# Altium PCB MicroMod_ATP_CarrierBoard.PcbDoc (part 1 of 2)
Units mil, origin at the board's own origin, x right, y up, seen from the top; angles counter-clockwise.
Board outline 3400 x 2200 mil, 2 copper layers (Top, Bottom); 222 components, 72 nets, 322 pads, 144 vias.
Unrouted connection lines stored in the file: 6.
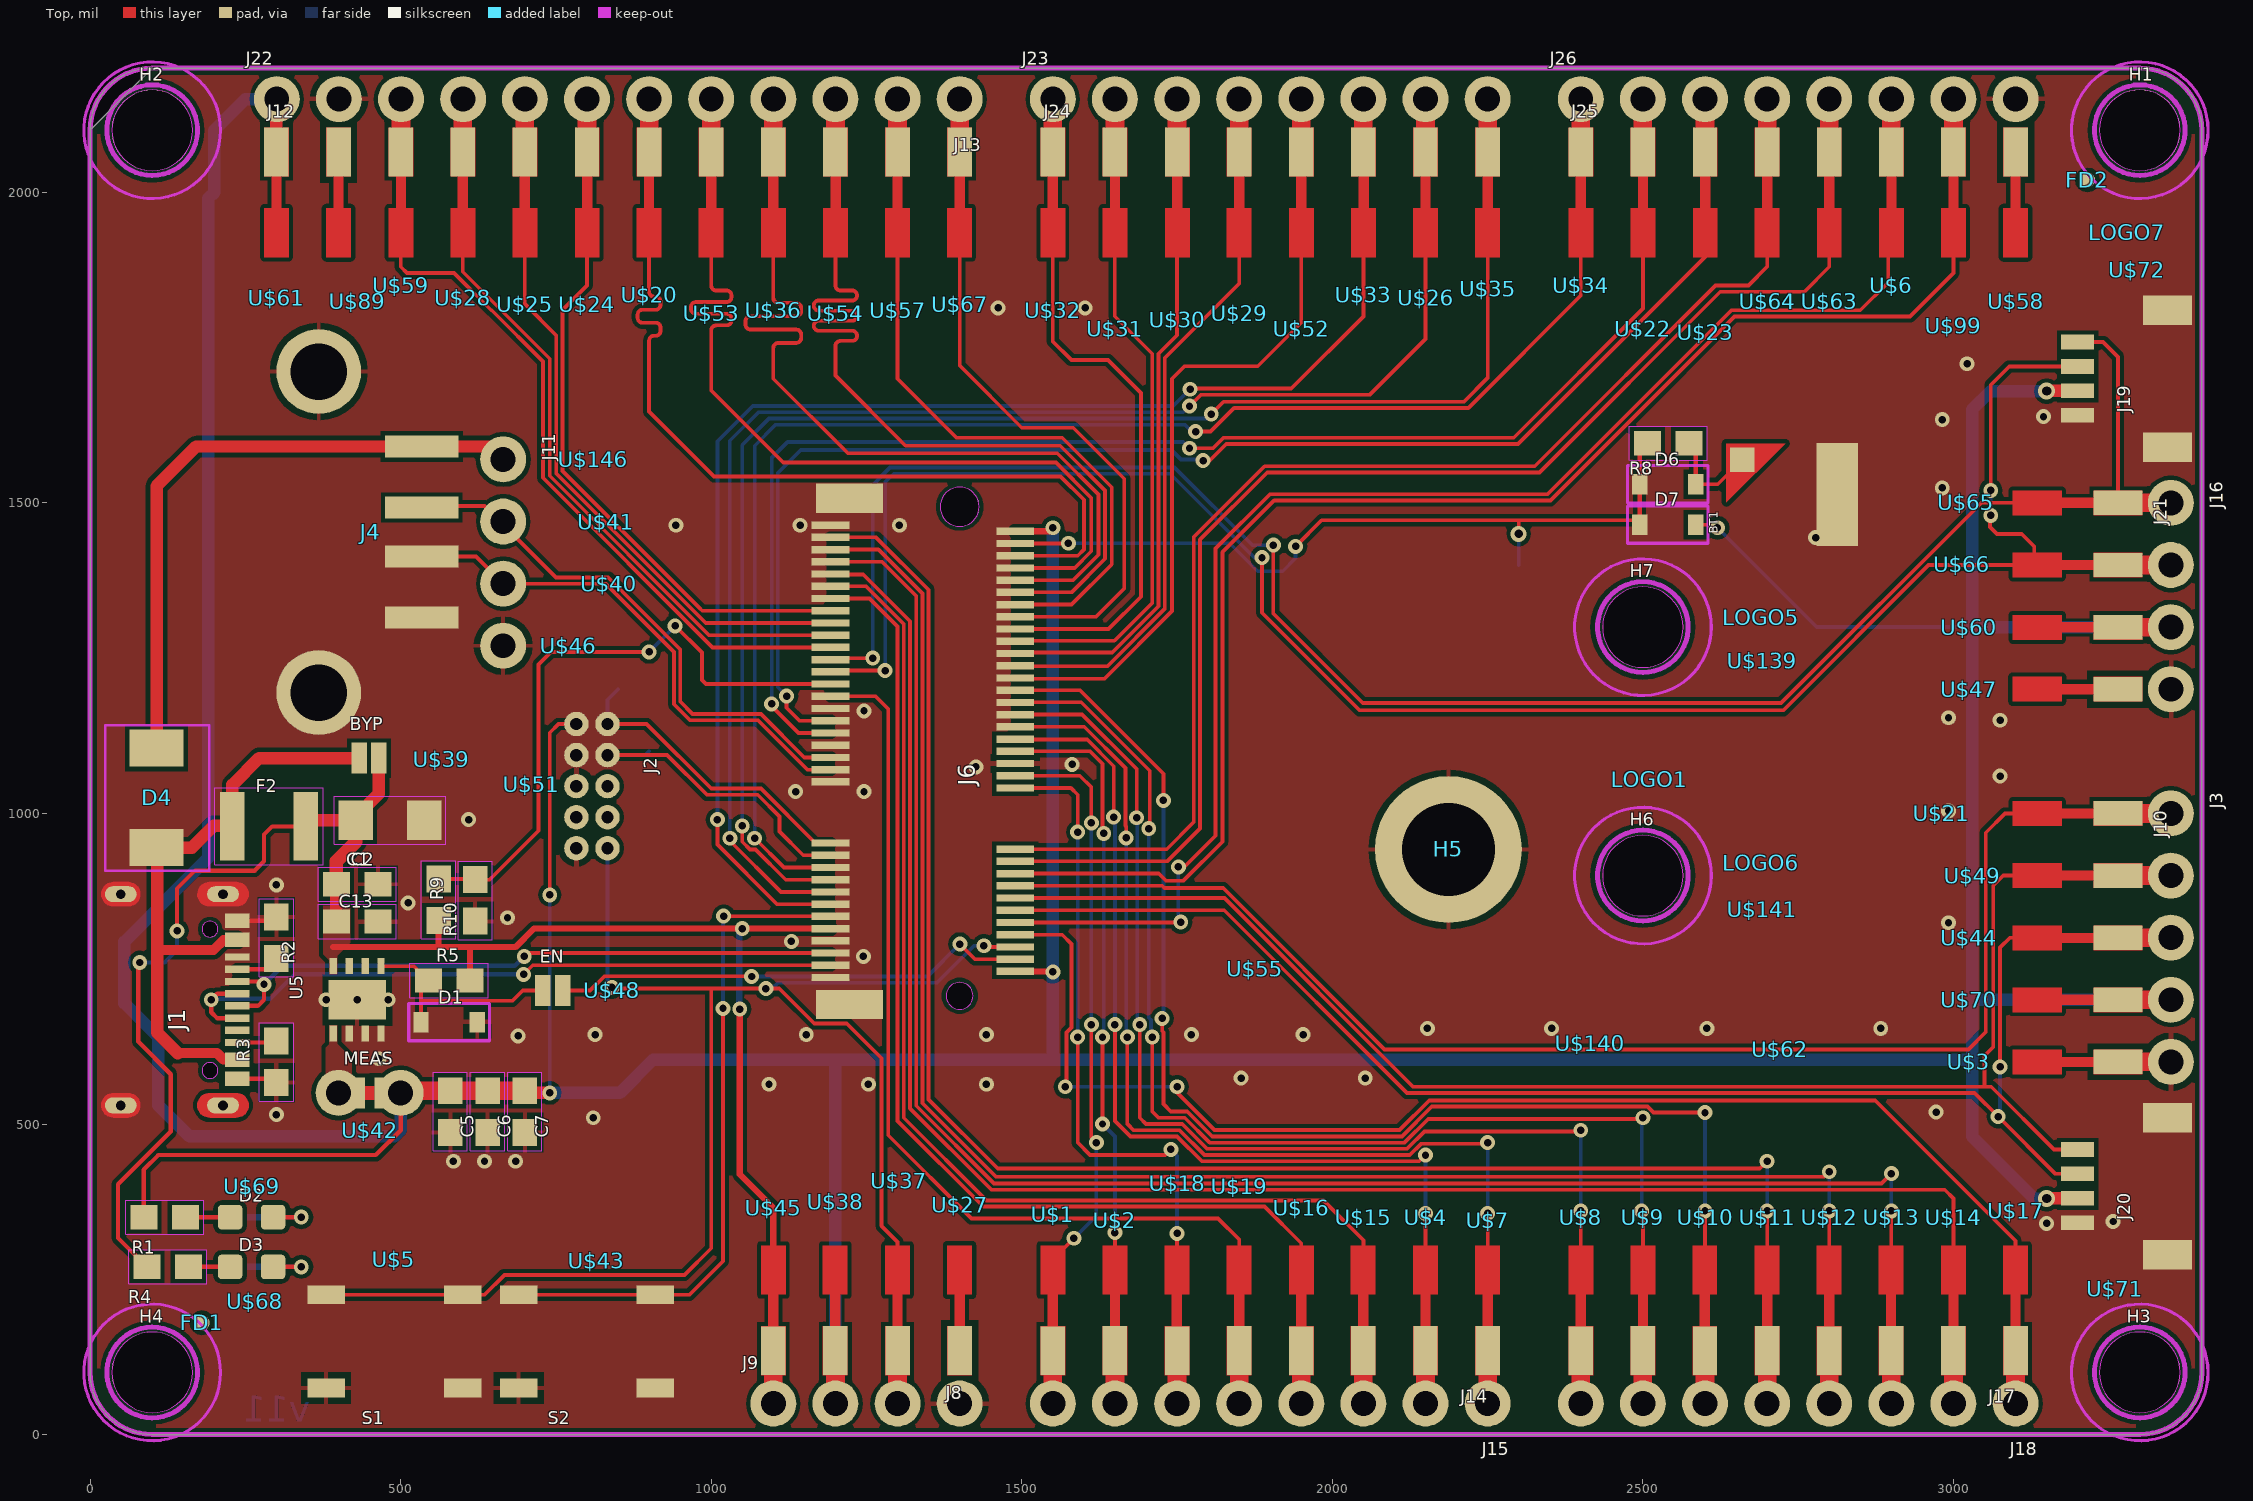
[diagram p0: Top view]
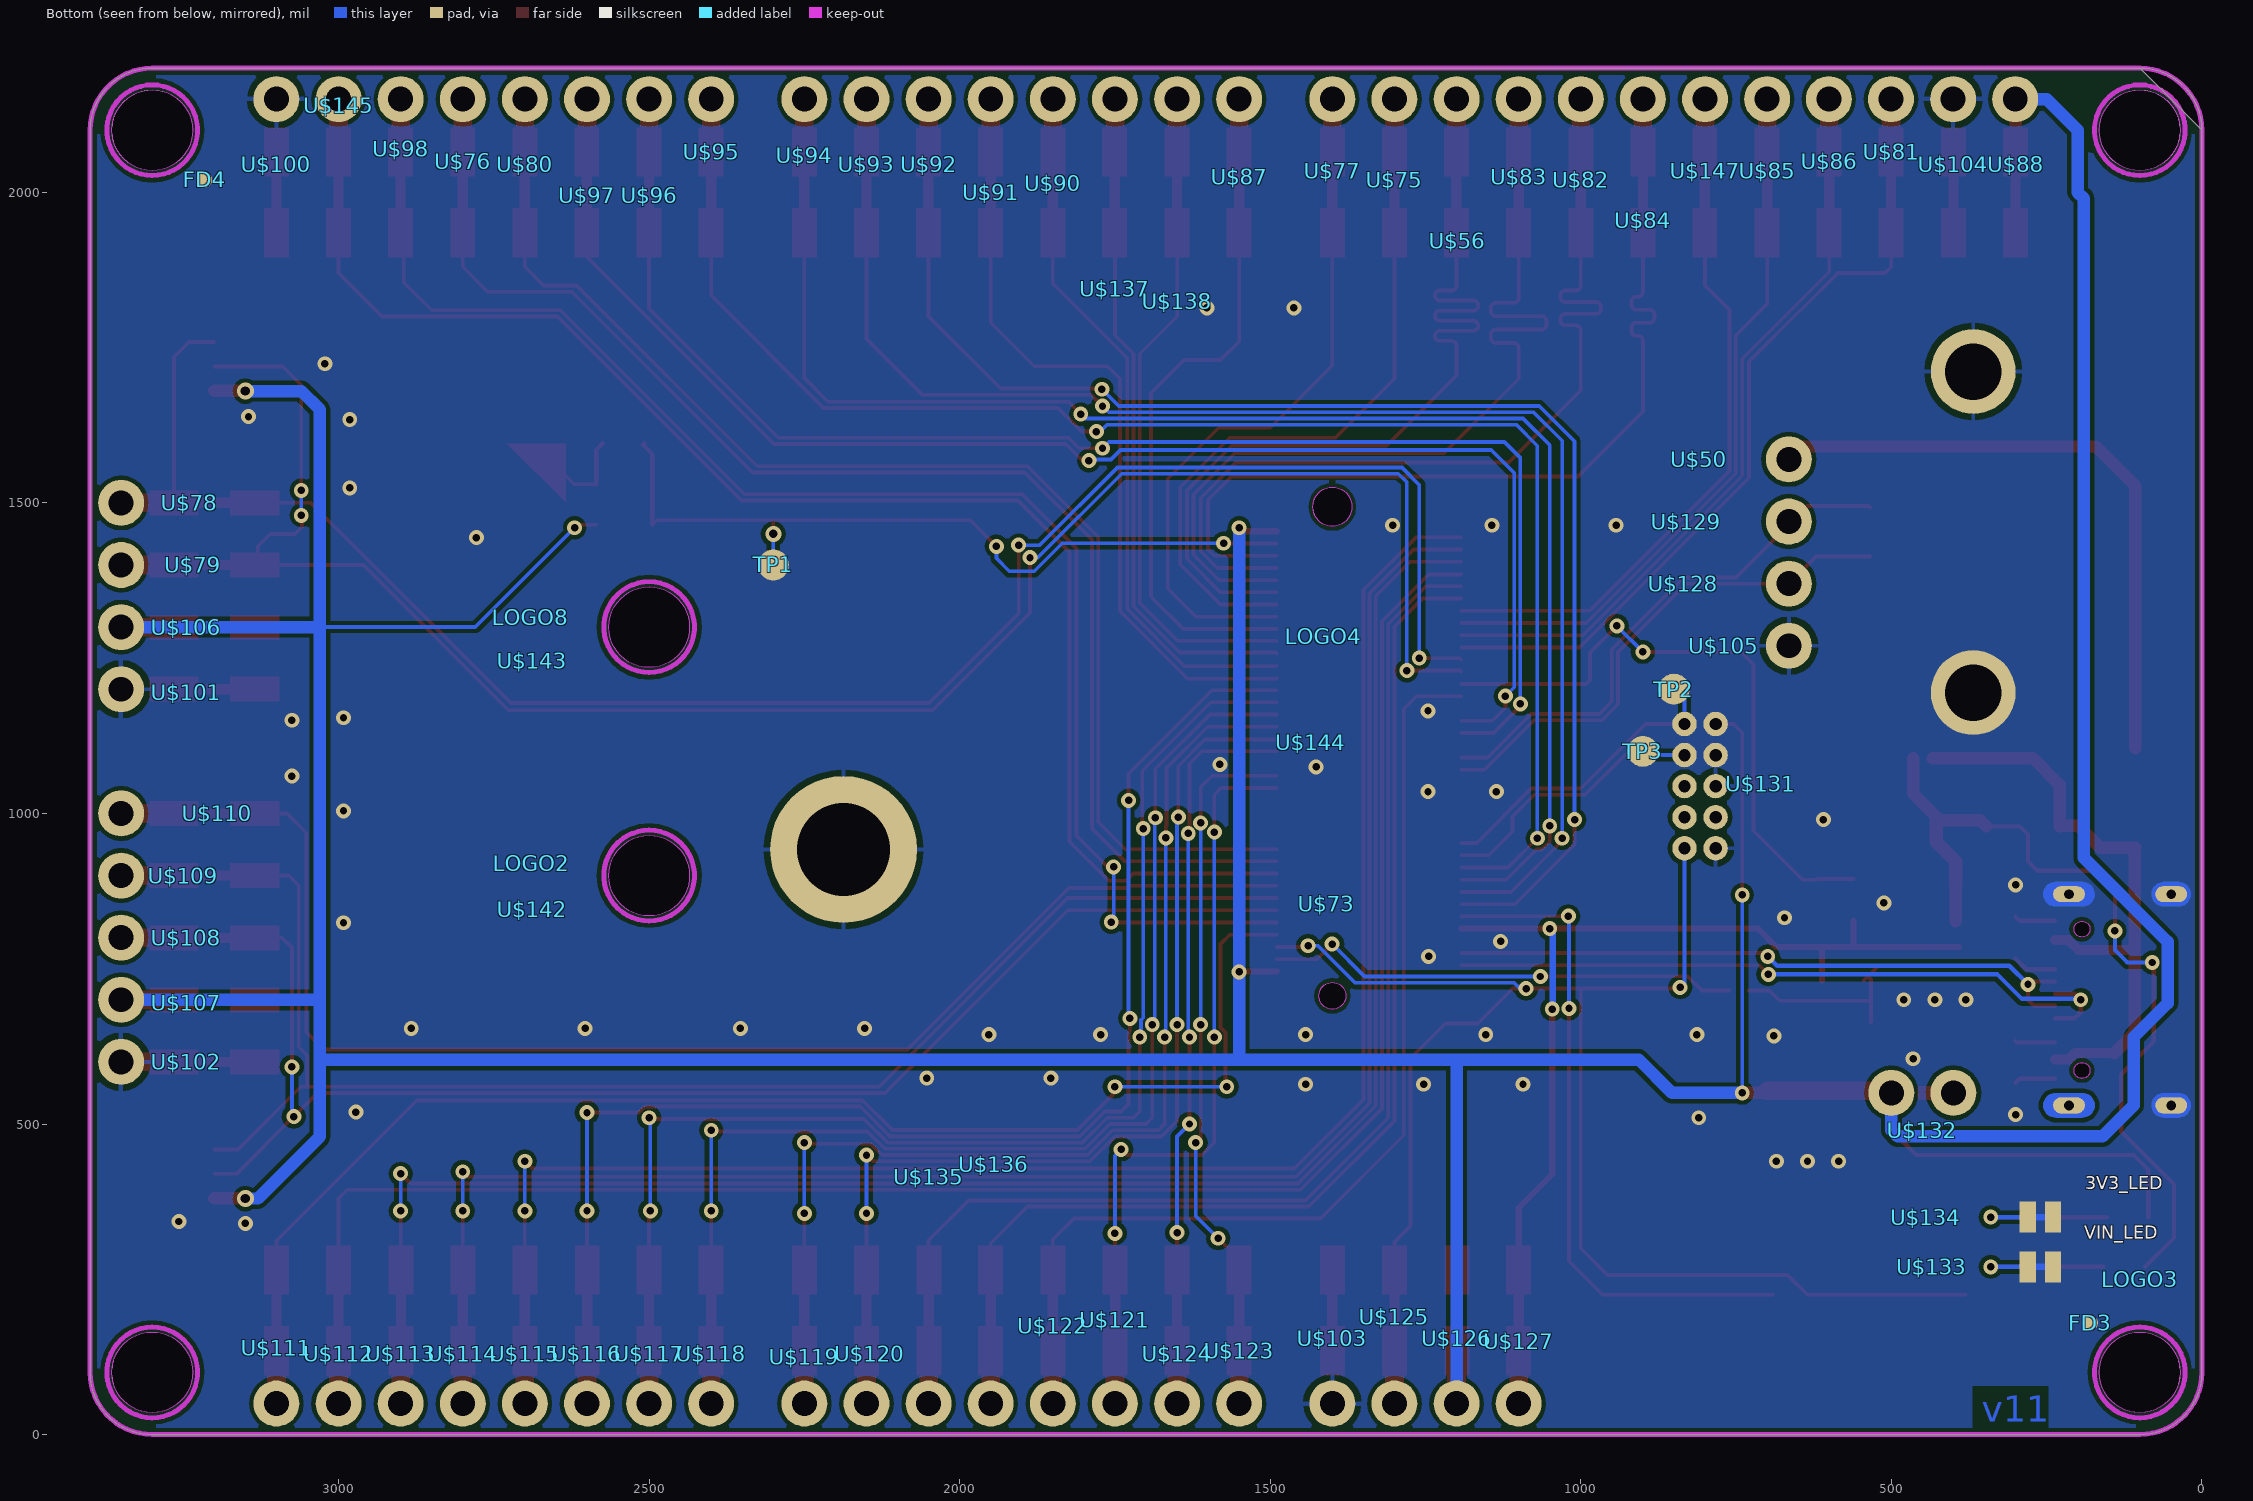
[diagram p1: Bottom view, seen from below]

## Layer stack, top to bottom
Top Solder: solder mask 0.4, Solder Resist, Dk 3.5
Top: signal copper 1.378
Dielectric 1: dielectric 12.6, FR-4, Dk 4.8
Bottom: signal copper 1.378
Bottom Solder: solder mask 0.4, Solder Resist, Dk 3.5

## Board outline
0,2100 cw(c100,2100) 100,2200 3300,2200 cw(c3300,2100) 3400,2100 3400,100 cw(c3300,100) 3300,0 100,0 cw(c100,100) 0,100 0,2100 cw(c100,2100)
cut-out: 3300,35 ccw(c3300,100) 3365,100 ccw(c3300,100) 3300,165 ccw(c3300,100) 3235,100 ccw(c3300,100)
cut-out: 100,35 ccw(c100,100) 165,100 ccw(c100,100) 100,165 ccw(c100,100) 35,100 ccw(c100,100)
cut-out: 2500,1235 ccw(c2500,1300) 2565,1300 ccw(c2500,1300) 2500,1365 ccw(c2500,1300) 2435,1300 ccw(c2500,1300)
cut-out: 2500,835 ccw(c2500,900) 2565,900 ccw(c2500,900) 2500,965 ccw(c2500,900) 2435,900 ccw(c2500,900)
cut-out: 3300,2035 ccw(c3300,2100) 3365,2100 ccw(c3300,2100) 3300,2165 ccw(c3300,2100) 3235,2100 ccw(c3300,2100)
cut-out: 100,2035 ccw(c100,2100) 165,2100 ccw(c100,2100) 100,2165 ccw(c100,2100) 35,2100 ccw(c100,2100)
cut-out: 1400,1462.2 ccw(c1400,1493.7) 1431.49,1493.7 ccw(c1400,1493.7) 1400,1525.19 ccw(c1400,1493.7) 1368.51,1493.7 ccw(c1400,1493.7)
cut-out: 1400,684.64 ccw(c1400,706.3) 1421.65,706.3 ccw(c1400,706.3) 1400,727.96 ccw(c1400,706.3) 1378.35,706.3 ccw(c1400,706.3)
cut-out: 193.11,800.99 ccw(c193.11,813.78) 205.91,813.78 ccw(c193.11,813.78) 193.11,826.58 ccw(c193.11,813.78) 180.31,813.78 ccw(c193.11,813.78)
cut-out: 193.11,573.42 ccw(c193.11,586.22) 205.91,586.22 ccw(c193.11,586.22) 193.11,599.01 ccw(c193.11,586.22) 180.31,586.22 ccw(c193.11,586.22)

## Design rules (kind name [scope] priority, off if disabled: settings)
BoardOutlineClearance mdCopperDimension [All] p1: gap=10 ignorepadtopadclearanceinfootprint=FALSE except(0: Arc-SplitContinuation Track-SplitContinuation SMDPad-SplitContinuation THPad-SplitContinuation Via-SplitContinuation Fill-SplitContinuation Poly-SplitContinuation Region-SplitContinuation Text-SplitContinuation; 4: Poly-OutlineEdge Poly-CavityEdge Poly-CutoutEdge Poly-SplitBarrior)
Clearance Clearance_for_PolygonClass_Isolate_12 [InPolygonClass('Isolate_12') vs IsArc Or IsTrack Or IsPad Or IsVia Or IsFill Or IsRegion Or IsText] p1: gap=12 ignorepadtopadclearanceinfootprint=FALSE
Clearance Clearance_for_PolygonClass_Isolate_7 [InPolygonClass('Isolate_7') vs IsArc Or IsTrack Or IsPad Or IsVia Or IsFill Or IsRegion Or IsText] p2: gap=7 ignorepadtopadclearanceinfootprint=FALSE
Clearance "Clearance (Same Net)" [All] p3: gap=4 ignorepadtopadclearanceinfootprint=FALSE
Clearance [All] p4: gap=4 ignorepadtopadclearanceinfootprint=FALSE
HoleSize "HoleSize_For_NetClass_Diff pairs" [InNetClass('Diff pairs')] p1: absolutevalues=TRUE maxlimit=0 minlimit=0 maxpercent=80.000 minpercent=20.000
HoleSize HoleSize_For_NetClass_power [InNetClass('power')] p2: absolutevalues=TRUE maxlimit=0 minlimit=0 maxpercent=80.000 minpercent=20.000
HoleSize [All] p3: absolutevalues=TRUE maxlimit=100000 minlimit=6 maxpercent=80.000 minpercent=20.000
HoleToHoleClearance mdDrill [All] p1: gap=4 allowstackedmicrovias=TRUE
MinimumSolderMaskSliver [All] p1 off: minsoldermaskwidth=10
PasteMaskExpansion Expansion_SMDPaste_OFF [InPadClass('SMDPaste_OFF')] p1: expansion=0
PasteMaskExpansion mlMinCreamFrame [All] p2: expansion=0
PolygonConnect PolygonConnect_For_PolygonThermal_ON_Width70000_Gap100000 [InPolygonClass('PolygonThermal_ON_Width70000_Gap100000') vs Not IsVia] p1: connectstyle=Relief reliefconductorwidth=7 reliefentries=4 polygonreliefangle="90 Angle" airgapwidth=10
PolygonConnect PolygonConnect_For_PolygonThermal_OFF [InPolygonClass('PolygonThermal_OFF')] p2: connectstyle=Direct reliefconductorwidth=10 reliefentries=4 polygonreliefangle="90 Angle" airgapwidth=10
PolygonConnect ThermalVias [IsVia] p3: connectstyle=Direct reliefconductorwidth=10 reliefentries=4 polygonreliefangle="90 Angle" airgapwidth=10
PolygonConnect [All] p4: connectstyle=Relief reliefconductorwidth=10 reliefentries=4 polygonreliefangle="90 Angle" airgapwidth=10
RoutingVias [All] p1: holewidth=6 width=16 viastyle="Through Hole" minholewidth=6 minwidth=16 maxholewidth=100 maxwidth=100
SolderMaskExpansion Expansion_SMDSolder_OFF [InPadClass('SMDSolder_OFF')] p1: expansion=0 istentingtop=FALSE
SolderMaskExpansion mlMinStopFrame [All] p2: expansion=4 istentingtop=FALSE
Width "Width_For_NetClass_Diff pairs" [InNetClass('Diff pairs')] p1: maxlimit=10 minlimit=99999 preferedwidth=0 toplayer_minwidth=0 bottomlayer_minwidth=0
Width Width_For_NetClass_power [InNetClass('power')] p2: maxlimit=60 minlimit=10 preferedwidth=30
Width [All] p3: maxlimit=10000 minlimit=4 preferedwidth=4
26 further rules are at their usual default settings.

## Classes and differential pairs
polygon class PolygonThermal_ON_Width70000_Gap100000: Polygon_1_Net_GND Polygon_2_Net_GND
polygon class PolygonThermal_OFF: Polygon_1_Net_OUT_MEAS Polygon_1_Net_VIN
polygon class Isolate_12: Polygon_1_Net_OUT_MEAS Polygon_1_Net_VIN
polygon class Isolate_7: Polygon_1_Net_GND Polygon_2_Net_GND
pad class SMDSolder_OFF: BT1-+ BT1-- J8-1 J8-2 J8-3 J8-4 J10-1 J10-2 J10-3 J10-4 J10-5 J12-1 J12-2 J12-3 J12-4 J12-5 J12-6 J12-7 J12-8 J12-9 J12-10 J12-11 J12-12 J14-1 J14-2 J14-3 J14-4 J14-5 J14-6 J14-7 J14-8 J17-1 J17-2 J17-3 J17-4 J17-5 J17-6 J17-7 J17-8 J21-1 J21-2 J21-3 J21-4 J24-1 J24-2 J24-3 J24-4 J24-5 J24-6 J24-7 J24-8 J25-1 J25-2 J25-3 J25-4 J25-5 J25-6 J25-7 J25-8
pad class SMDPaste_OFF: 3V3_LED-1 3V3_LED-2 BT1-+ BT1-- BYP-1 BYP-2 EN-1 EN-2 FD1-1 FD2-1 FD3-1 FD4-1 J6-1 J6-2 J6-3 J6-4 J6-5 J6-6 J6-7 J6-8 J6-9 J6-10 J6-11 J6-12 J6-13 J6-14 J6-15 J6-16 J6-17 J6-18 J6-19 J6-20 J6-21 J6-22 J6-23 J6-32 J6-33 J6-34 J6-35 J6-36 J6-37 J6-38 J6-39 J6-40 J6-41 J6-42 J6-43 J6-44 J6-45 J6-46 J6-47 J6-48 J6-49 J6-50 J6-51 J6-52 J6-53 J6-54 J6-55 J6-56 J6-57 J6-58 J6-59 J6-60 J6-61 J6-62 J6-63 J6-64 J6-65 J6-66 J6-67 J6-68 J6-69 J6-70 J6-71 J6-72 J6-73 J6-74 J6-75 J8-3 J8-4 J10-3 J10-4 J10-5 J12-3 J12-4 J12-5 J12-6 J12-7 J12-8 J12-9 J12-10 J12-11 J12-12 J14-1 J14-2 J14-3 J14-4 J14-5 J14-6 J14-7 J14-8 J17-1 J17-2 J17-3 J17-4 J17-5 J17-6 J17-7 J17-8 J21-3 J21-4 J24-1 J24-2 J24-3 J24-4 J24-5 J24-6 J24-7 J24-8 J25-1 J25-2 J25-3 J25-4 J25-5 J25-6 J25-7 J25-8 MEAS-1 MEAS-2 TP1-P$1 TP2-P$1 TP3-P$1 U5-EP VIN_LED-1 VIN_LED-2
net class "Diff pairs": G9/ADC_N G10/ADC_P USB_N USB_P USBHOST_N USBHOST_P

## Components (designator, comment, footprint, x,y, rotation, side; value= is the part's Value field where it differs from the comment)
3V3_LED "JUMPER-SMT_2_NC_TRACE_SILK" SMT-JUMPER_2_NC_TRACE_SILK 260,350 r180 bottom
BT1 "ML414H" ML414H_IV01E 2740,1490 r90 top
BYP "JUMPER-SMT_2_NO_SILK" SMT-JUMPER_2_NO_SILK 449,1089 r0 top
C1 "0.1uF" 0603 430,886 r0 top
C2 "10uF" EIA3216 483,989 r180 top
C5 "1.0uF" 0603 580,520 r270 top
C6 "0.1uF" 0603 640,520 r270 top
C7 "0.22uF" 0603 700,520 r270 top
C13 "0.22uF" 0603 430,826 r0 top
D1 "3.3V" SOD-323 578,664 r0 top
D2 "RED" LED-0603 260,350 r0 top
D3 "RED" LED-0603 260,270 r0 top
D4 "" DO-214BA 107,1025 r90 top
D6 "3A/10V/280mV" SOD-323 2540,1530 r0 top
D7 "1A/23V/620mV" SOD-323 2540,1465 r0 top
EN "JUMPER-SMT_2_NO_SILK" SMT-JUMPER_2_NO_SILK 745,715 r0 top
F2 "6V/2A" 1210 288,979 r0 top
FD1 "" FIDUCIAL-MICRO 180,180 r0 top
FD2 "" FIDUCIAL-MICRO 3215.63,2020 r0 top
FD3 "" FIDUCIAL-MICRO 180,180 r180 bottom
FD4 "" FIDUCIAL-MICRO 3215.63,2020 r180 bottom
FRAME1 "" CREATIVE_COMMONS 810,-620 r0 top
H1 "STAND-OFF" STAND-OFF 3300,2100 r0 top
H2 "STAND-OFF" STAND-OFF 100,2100 r0 top
H3 "STAND-OFF" STAND-OFF 3300,100 r0 top
H4 "STAND-OFF" STAND-OFF 100,100 r0 top
H5 "" STAND-OFF-REFLOW-M2.5 2187,942 r0 top
H6 "STAND-OFF" STAND-OFF 2500,900 r0 top
H7 "STAND-OFF" STAND-OFF 2500,1300 r0 top
J1 "" USB-C-16P-2LAYER-PADS 250,700 r270 top
J2 "JTAG" 2X5-PTH-1.27MM 808,1044 r270 top
J3 "" 1X05_NO_SILK 3350,1000 r270 top
J4 "USB_A_SMT_FEMALE" USB-A-S-SILK-FEMALE 250,1453 r0 top
J6 "MICROMOD-2222-C" M.2-CONNECTOR-E 1400,1100 r270 top
J8 "1X04_SMD_STRAIGHT_COMBO" 1X04_SMD_VERTICAL_COMBO 1400,200 r180 top
J9 "" 1X04_NO_SILK 1100,50 r0 top
J10 "" 1X05_SMD_VERTICAL_COMBO 3200,1000 r270 top
J11 "" 1X04_NO_SILK 665,1570 r270 top
J12 "" 1X12_SMD_COMBINED 300,2000 r0 top
J13 "" 1X08_NO_SILK 1400,2150 r180 top
J14 "" 1X08_SMD_COMBINED 2250,200 r180 top
J15 "" 1X08_NO_SILK 2250,50 r180 top
J16 "" 1X04_NO_SILK 3350,1500 r270 top
J17 "" 1X08_SMD_COMBINED 3100,200 r180 top
J18 "" 1X08_NO_SILK 3100,50 r180 top
J19 "QWIIC_RIGHT_ANGLE" JST04_1MM_RA 3200,1700 r90 top
J20 "QWIIC_RIGHT_ANGLE" JST04_1MM_RA 3200,400 r90 top
J21 "1X04_SMD_STRAIGHT_COMBO" 1X04_SMD_VERTICAL_COMBO 3200,1500 r270 top
J22 "" 1X04_NO_SILK 300.59,2150 r0 top
J23 "" 1X08_NO_SILK 1550,2150 r0 top
J24 "" 1X08_SMD_COMBINED 1550,2000 r0 top
J25 "" 1X08_SMD_COMBINED 2400,2000 r0 top
J26 "" 1X08_NO_SILK 2400,2150 r0 top
LOGO1 "" SFE_LOGO_NAME_FLAME_.1 2510,1055 r0 top
LOGO2 "" QWIIC_5MM 2690,920 r180 bottom
LOGO3 "" OSHW-LOGO-MINI 100,250 r180 bottom
LOGO4 "" SFE_LOGO_NAME_FLAME_.2 1415,1285 r180 bottom
LOGO5 "" QWIIC_5MM 2689.37,1316 r0 top
LOGO6 "" QWIIC_5MM 2689.37,921 r0 top
LOGO7 "" QWIIC_5MM 3278.63,1936 r0 top
LOGO8 "" QWIIC_5MM 2691.37,1316 r180 bottom
MEAS "" COMBO-JUMPER_2_NC_TRACE 450,550 r0 top
R1 "1k" 0603 120,350 r180 top
R2 "5.1k" 0603 300,800 r270 top
R3 "5.1k" 0603 300,600 r90 top
R4 "1k" 0603 125,270 r180 top
R5 "100k" 0603 578,731 r0 top
R8 "1k" 0603 2541,1596 r180 top
R9 "10k" 0603 620,860 r90 top
R10 "20k" 0603 561,861 r270 top
S1 "Reset" TACTILE_SWITCH_SMD_5.2MM 490,150 r180 top
S2 "BOOT" TACTILE_SWITCH_SMD_5.2MM 800,150 r180 top
TP1 "" PAD.03X.05 2300,1400 r180 bottom
TP2 "" PAD.03X.05 850,1200 r180 bottom
TP3 "" PAD.03X.05 900,1100 r180 bottom
U5 "AP7361C-33" UDFN-8 430,700 r0 top
U$1 "" #A0#10 1550,355 r90 top
U$2 "" #A1#10 1650,345 r90 top
U$3 "" #GND#0 3025,600 r0 top
U$4 "" #G0#2 2150,350 r90 top
U$5 "" #RESET10 489.09,282.24 r0 top
U$6 "" #D0#0 2900,1850 r90 top
U$7 "" #G1#2 2250,345 r90 top
U$8 "" #G2#2 2400,350 r90 top
U$9 "" #G3#3 2500,350 r90 top
U$10 "" #G4#4 2600,350 r90 top
U$11 "" #G5#5 2700,350 r90 top
U$12 "" #G6#6 2800,350 r90 top
U$13 "" #G7#7 2900,350 r90 top
U$14 "" #G8#8 3000,350 r90 top
U$15 "" #G9#9 2050,350 r90 top
U$16 "" #G10#10 1950,365 r90 top
U$17 "" #G11#10 3100,360 r90 top
U$18 "" #PWM0#10 1750,405 r90 top
U$19 "" #PWM1#10 1850,400 r90 top
U$20 "" ##CS1##5178039 900,1835 r90 top
U$21 "" ##I2C_INT##10 2980,1000 r0 top
U$22 "" #CAN_RX#9 2500,1780 r90 top
U$23 "" #CAN_TX#10 2600,1775 r90 top
U$24 "" #CIPO#3 800,1820 r90 top
U$25 "" #COPI#2 700,1820 r90 top
U$26 "" #CTS#6 2150,1830 r90 top
U$27 "" #GND#0 1400,370 r90 top
U$28 "" #SCK#2 600,1830 r90 top
U$29 "" #I2S_FS#5 1850,1805 r90 top
U$30 "" #I2S_SDI#5 1750,1795 r90 top
U$31 "" #I2S_SDO#5 1650,1780 r90 top
U$32 "" #MCLK#4 1550,1810 r90 top
U$33 "" #RTS#5 2050,1835 r90 top
U$34 "" #RX#8 2400,1850 r90 top
U$35 "" #TX#7 2250,1845 r90 top
U$36 "" #DAT1#5178039 1100,1810 r90 top
U$37 "" ##RESET##7 1302,409 r90 top
U$38 "" #3V3#1 1200,375 r90 top
U$39 "" #BYP#8 565,1087 r0 top
U$40 "" #HOST_D##9 835,1370 r0 top
U$41 "" #HOST_D##10 830,1470 r0 top
U$42 "" #MEAS#10 450,490 r0 top
U$43 "" BOOT10 815,280 r0 top
U$44 "" #SDA#4 3025,800 r0 top
U$45 "" #VIN#6 1100,365 r90 top
U$46 "" #GND#0 770,1270 r0 top
U$47 "" #GND#0 3025,1200 r0 top
U$48 "" #EN#0 840,715 r0 top
U$49 "" #SCL#5 3030,900 r0 top
U$50 "" #VHOST#0 810,1570 r180 bottom
U$51 "" #SWD#10 710,1046.63 r90 top
U$52 "" #I2S_CLK#5 1950,1780 r90 top
U$53 "" #DAT2#5178039 1000,1805 r90 top
U$54 "" #CIPO1#5178039 1200,1805 r90 top
U$55 "" 22229 1875,750 r0 top
U$56 "" ##CIPO1##DAT0#5178038 1198.82,1921.65 r270 bottom
U$57 "" #COPI1#2 1300,1810 r90 top
U$58 "" #GND#0 3100,1825 r90 top
U$59 "" ##CS##0 500,1850 r90 top
U$60 "" #3V3#1 3025,1300 r0 top
U$61 "" #3V3#1 300,1830 r90 top
U$62 "" ATP0 2720,620 r0 top
U$63 "" #RX2#3 2800,1825 r90 top
U$64 "" #TX2#2 2700,1825 r90 top
U$65 "" #SCL1#3 3020,1501 r0 top
U$66 "" #SDA1#3 3013,1401 r0 top
U$67 "" #SCK1#2 1400,1820 r90 top
U$68 "" VIN3 265,215 r0 top
U$69 "" 3V34 260,400 r0 top
U$70 "" #3V3#1 3025,700 r0 top
U$71 "" I2C4 3260,235 r0 top
U$72 "" I2C14 3295,1875 r0 top
U$73 "" ATP_CARRIER_BOARD1 1410,855 r180 bottom
U$75 "" #COPI1#2 1300,2020 r270 bottom
U$76 "" #RX2#3 2800,2050 r270 bottom
U$77 "" #SCK1#2 1400,2035 r270 bottom
U$78 "" #SCL1#3 3240,1500 r180 bottom
U$79 "" #SDA1#3 3235,1400 r180 bottom
U$80 "" #TX2#2 2700,2045 r270 bottom
U$81 "" ##CS##5178037 500,2065 r270 bottom
U$82 "" #DAT2#5 1000,2020 r270 bottom
U$83 "" #DAT1#5 1100,2025 r270 bottom
U$84 "" ##CS1##DAT3#5178037 900,1955 r270 bottom
U$85 "" #COPI#4 700,2035 r270 bottom
U$86 "" #SCK#4 600,2050 r270 bottom
U$87 "" #MCLK#6 1550,2025 r270 bottom
U$88 "" #3V3#1 300,2045 r270 bottom
U$89 "" #GND#0 430,1825 r90 top
U$90 "" #I2S_FS#7 1850,2015 r270 bottom
U$91 "" #I2S_CLK#7 1950,2000 r270 bottom
U$92 "" #RTS#7 2050,2045 r270 bottom
U$93 "" #CTS#8 2150,2045 r270 bottom
U$94 "" #TX#9 2250,2060 r270 bottom
U$95 "" #RX#10 2400,2065 r270 bottom
U$96 "" #CAN_RX#10 2500,1995 r270 bottom
U$97 "" #CAN_TX#10 2600,1995 r270 bottom
U$98 "" #D0#0 2900,2070 r270 bottom
U$99 "" D10 3000,1785 r90 top
U$100 "" #GND#0 3100,2045 r270 bottom
U$101 "" #GND#0 3245,1195 r180 bottom
U$102 "" #GND#0 3245,600 r180 bottom
U$103 "" #GND#0 1400,155 r270 bottom
U$104 "" #GND#0 400,2045 r270 bottom
U$105 "" #GND#0 770,1270 r180 bottom
U$106 "" #3V3#1 3245,1300 r180 bottom
U$107 "" #3V3#1 3245,695 r180 bottom
U$108 "" #SDA#4 3245,800 r180 bottom
U$109 "" #SCL#5 3250,900 r180 bottom
U$110 "" ##I2C_INT##10 3195,1000 r180 bottom
U$111 "" #G11#10 3100,140 r270 bottom
U$112 "" #G8#8 3000,130 r270 bottom
U$113 "" #G7#7 2900,130 r270 bottom
U$114 "" #G6#6 2800,130 r270 bottom
U$115 "" #G5#5 2700,130 r270 bottom
U$116 "" #G4#4 2600,130 r270 bottom
U$117 "" #G3#3 2500,130 r270 bottom
U$118 "" #G2#2 2400,130 r270 bottom
U$119 "" #G1#2 2250,125 r270 bottom
U$120 "" #G0#2 2145,130 r270 bottom
U$121 "" #PWM0#10 1750,185 r270 bottom
U$122 "" #PWM1#10 1850,175 r270 bottom
U$123 "" #A0#10 1550,135 r270 bottom
U$124 "" #A1#10 1650,130 r270 bottom
U$125 "" ##RESET##7 1300,190 r270 bottom
U$126 "" #3V3#1 1200,155 r270 bottom
U$127 "" #VIN#6 1100,150 r270 bottom
U$128 "" #HOST_D##9 835,1370 r180 bottom
U$129 "" #HOST_D##10 830,1470 r180 bottom
U$131 "" #SWD#10 710,1047.63 r270 bottom
U$132 "" #MEAS#10 450,490 r180 bottom
U$133 "" #VIN_LED#10 435,270 r180 bottom
U$134 "" #3V3_LED#10 445,350 r180 bottom
U$135 "" #G9#ADC##CAM_HSYNC#9 2050,415 r270 bottom
U$136 "" #G10#ADC##CAM_VSYNC#10 1945,435 r270 bottom
U$137 "" #I2S_SDI#CAM_PCLK#7 1750,1845 r270 bottom
U$138 "" #I2S_SDO#CAM_MCLK#7 1650,1825 r270 bottom
U$139 "" MOUNT10 2692.34,1245.63 r0 top
U$140 "" MICROMOD_MI_LOGO_1 2415,630 r0 top
U$141 "" MOUNT10 2692.34,845.63 r0 top
U$142 "" MOUNT10 2688.4,845.63 r180 bottom
U$143 "" MOUNT10 2688.4,1245.63 r180 bottom
U$144 "" MICROMOD_LOGO_1 1435,1115 r180 bottom
U$145 "" D10 3000,2140 r270 bottom
U$146 "" #VHOST#0 810,1570 r0 top
U$147 "" #CIPO#5178038 800,2035 r270 bottom
VIN_LED "JUMPER-SMT_2_NC_TRACE_SILK" SMT-JUMPER_2_NC_TRACE_SILK 260,270 r180 bottom

## Footprints (in the part's own frame and the unit in brackets; to place one, negate y for a bottom-side part, rotate by r counter-clockwise, add the part's x,y. Pads: shape width x height; smd on the part's side, far side on the other; paste and mask are expansions set on the pad)
1X04_NO_SILK [mil] "1X04_NO_SILK"
  round 74 hole 40: 1(0,0) 2(100,0) 3(200,0) 4(300,0)
1X04_SMD_VERTICAL_COMBO [mm] "1X04_SMD_VERTICAL_COMBO"
  rect 1x2 smd mask+0: 1(0,1.65) 2(2.54,1.65)
  rect 1x2 smd paste+0 mask+0: 3(5.08,1.65) 4(7.62,1.652)
  Top region: 7.12,2.65 8.12,2.65 8.12,0.65 7.82,0.65 7.82,-0.65 8.12,-0.65 8.12,-2.65 7.12,-2.65 7.12,-0.65 7.42,-0.65 7.42,0.65 7.12,0.65 7.12,2.65
  Top region: 4.59,2.65 5.59,2.65 5.59,0.65 5.29,0.65 5.29,-0.65 5.59,-0.65 5.59,-2.65 4.59,-2.65 4.59,-0.65 4.89,-0.65 4.89,0.65 4.59,0.65 4.59,2.65
  Top region: -0.5,2.65 0.5,2.65 0.5,0.65 0.2,0.65 0.2,-0.65 0.5,-0.65 0.5,-2.65 -0.5,-2.65 -0.5,-0.65 -0.2,-0.65 -0.2,0.65 -0.5,0.65 -0.5,2.65
  Top region: 2.04,2.65 3.04,2.65 3.04,0.65 2.74,0.65 2.74,-0.65 3.04,-0.65 3.04,-2.65 2.04,-2.65 2.04,-0.65 2.34,-0.65 2.34,0.65 2.04,0.65 2.04,2.65
1X05_NO_SILK [mil] "1X05_NO_SILK"
  round 74 hole 40: 1(0,0) 2(100,0) 3(200,0) 4(300,0) 5(400,0)
1X05_SMD_VERTICAL_COMBO [mm] "1X05_SMD_VERTICAL_COMBO"
  rect 1x2 smd mask+0: 1(0,1.65) 2(2.54,1.65)
  rect 1x2 smd paste+0 mask+0: 3(5.08,1.65) 4(7.62,1.652) 5(10.16,1.65)
  Top region: 9.66,2.65 10.66,2.65 10.66,0.65 10.36,0.65 10.36,-0.65 10.66,-0.65 10.66,-2.65 9.66,-2.65 9.66,-0.65 9.96,-0.65 9.96,0.65 9.66,0.65 9.66,2.65
  Top region: 7.12,2.65 8.12,2.65 8.12,0.65 7.82,0.65 7.82,-0.65 8.12,-0.65 8.12,-2.65 7.12,-2.65 7.12,-0.65 7.42,-0.65 7.42,0.65 7.12,0.65 7.12,2.65
  Top region: 4.59,2.65 5.59,2.65 5.59,0.65 5.29,0.65 5.29,-0.65 5.59,-0.65 5.59,-2.65 4.59,-2.65 4.59,-0.65 4.89,-0.65 4.89,0.65 4.59,0.65 4.59,2.65
  Top region: -0.5,2.65 0.5,2.65 0.5,0.65 0.2,0.65 0.2,-0.65 0.5,-0.65 0.5,-2.65 -0.5,-2.65 -0.5,-0.65 -0.2,-0.65 -0.2,0.65 -0.5,0.65 -0.5,2.65
  Top region: 2.04,2.65 3.04,2.65 3.04,0.65 2.74,0.65 2.74,-0.65 3.04,-0.65 3.04,-2.65 2.04,-2.65 2.04,-0.65 2.34,-0.65 2.34,0.65 2.04,0.65 2.04,2.65
1X08_NO_SILK [mil] "1X08_NO_SILK"
  round 74 hole 40: 1(0,0) 2(100,0) 3(200,0) 4(300,0) 5(400,0) 6(500,0) 7(600,0) 8(700,0)
1X08_SMD_COMBINED [mm] "1X08_SMD_COMBINED"
  rect 1x2 smd paste+0 mask+0: 1(0,1.65) 2(2.54,1.65) 3(5.08,1.65) 4(7.62,1.652) 5(10.16,1.65) 6(12.7,1.652) 7(15.24,1.65) 8(17.78,1.652)
  Top region: 14.74,2.65 15.74,2.65 15.74,0.65 15.44,0.65 15.44,-0.65 15.74,-0.65 15.74,-2.65 14.74,-2.65 14.74,-0.65 15.04,-0.65 15.04,0.65 14.74,0.65 14.74,2.65
  Top region: 17.28,2.65 18.28,2.65 18.28,0.65 17.98,0.65 17.98,-0.65 18.28,-0.65 18.28,-2.65 17.28,-2.65 17.28,-0.65 17.58,-0.65 17.58,0.65 17.28,0.65 17.28,2.65
  Top region: 12.21,2.65 13.21,2.65 13.21,0.65 12.91,0.65 12.91,-0.65 13.21,-0.65 13.21,-2.65 12.21,-2.65 12.21,-0.65 12.51,-0.65 12.51,0.65 12.21,0.65 12.21,2.65
  Top region: 9.66,2.65 10.66,2.65 10.66,0.65 10.36,0.65 10.36,-0.65 10.66,-0.65 10.66,-2.65 9.66,-2.65 9.66,-0.65 9.96,-0.65 9.96,0.65 9.66,0.65 9.66,2.65
  Top region: 7.12,2.65 8.12,2.65 8.12,0.65 7.82,0.65 7.82,-0.65 8.12,-0.65 8.12,-2.65 7.12,-2.65 7.12,-0.65 7.42,-0.65 7.42,0.65 7.12,0.65 7.12,2.65
  Top region: 4.59,2.65 5.59,2.65 5.59,0.65 5.29,0.65 5.29,-0.65 5.59,-0.65 5.59,-2.65 4.59,-2.65 4.59,-0.65 4.89,-0.65 4.89,0.65 4.59,0.65 4.59,2.65
  Top region: -0.5,2.65 0.5,2.65 0.5,0.65 0.2,0.65 0.2,-0.65 0.5,-0.65 0.5,-2.65 -0.5,-2.65 -0.5,-0.65 -0.2,-0.65 -0.2,0.65 -0.5,0.65 -0.5,2.65
  Top region: 2.04,2.65 3.04,2.65 3.04,0.65 2.74,0.65 2.74,-0.65 3.04,-0.65 3.04,-2.65 2.04,-2.65 2.04,-0.65 2.34,-0.65 2.34,0.65 2.04,0.65 2.04,2.65
1X12_SMD_COMBINED [mm] "1X12_SMD_COMBINED"
  rect 1x2 smd mask+0: 1(0,1.65) 2(2.54,1.65)
  rect 1x2 smd paste+0 mask+0: 3(5.08,1.65) 4(7.62,1.652) 5(10.16,1.65) 6(12.7,1.652) 7(15.24,1.65) 8(17.78,1.652) 9(20.32,1.65) 10(22.86,1.652) 11(25.4,1.65) 12(27.94,1.652)
  Top region: 24.9,2.65 25.9,2.65 25.9,0.65 25.6,0.65 25.6,-0.65 25.9,-0.65 25.9,-2.65 24.9,-2.65 24.9,-0.65 25.2,-0.65 25.2,0.65 24.9,0.65 24.9,2.65
  Top region: 27.44,2.65 28.44,2.65 28.44,0.65 28.14,0.65 28.14,-0.65 28.44,-0.65 28.44,-2.65 27.44,-2.65 27.44,-0.65 27.74,-0.65 27.74,0.65 27.44,0.65 27.44,2.65
  Top region: 22.37,2.65 23.37,2.65 23.37,0.65 23.07,0.65 23.07,-0.65 23.37,-0.65 23.37,-2.65 22.37,-2.65 22.37,-0.65 22.67,-0.65 22.67,0.65 22.37,0.65 22.37,2.65
  Top region: 19.82,2.65 20.82,2.65 20.82,0.65 20.52,0.65 20.52,-0.65 20.82,-0.65 20.82,-2.65 19.82,-2.65 19.82,-0.65 20.12,-0.65 20.12,0.65 19.82,0.65 19.82,2.65
  Top region: 14.74,2.65 15.74,2.65 15.74,0.65 15.44,0.65 15.44,-0.65 15.74,-0.65 15.74,-2.65 14.74,-2.65 14.74,-0.65 15.04,-0.65 15.04,0.65 14.74,0.65 14.74,2.65
  Top region: 17.28,2.65 18.28,2.65 18.28,0.65 17.98,0.65 17.98,-0.65 18.28,-0.65 18.28,-2.65 17.28,-2.65 17.28,-0.65 17.58,-0.65 17.58,0.65 17.28,0.65 17.28,2.65
  Top region: 12.21,2.65 13.21,2.65 13.21,0.65 12.91,0.65 12.91,-0.65 13.21,-0.65 13.21,-2.65 12.21,-2.65 12.21,-0.65 12.51,-0.65 12.51,0.65 12.21,0.65 12.21,2.65
  Top region: 9.66,2.65 10.66,2.65 10.66,0.65 10.36,0.65 10.36,-0.65 10.66,-0.65 10.66,-2.65 9.66,-2.65 9.66,-0.65 9.96,-0.65 9.96,0.65 9.66,0.65 9.66,2.65
  Top region: 7.12,2.65 8.12,2.65 8.12,0.65 7.82,0.65 7.82,-0.65 8.12,-0.65 8.12,-2.65 7.12,-2.65 7.12,-0.65 7.42,-0.65 7.42,0.65 7.12,0.65 7.12,2.65
  Top region: 4.59,2.65 5.59,2.65 5.59,0.65 5.29,0.65 5.29,-0.65 5.59,-0.65 5.59,-2.65 4.59,-2.65 4.59,-0.65 4.89,-0.65 4.89,0.65 4.59,0.65 4.59,2.65
  Top region: -0.5,2.65 0.5,2.65 0.5,0.65 0.2,0.65 0.2,-0.65 0.5,-0.65 0.5,-2.65 -0.5,-2.65 -0.5,-0.65 -0.2,-0.65 -0.2,0.65 -0.5,0.65 -0.5,2.65
  Top region: 2.04,2.65 3.04,2.65 3.04,0.65 2.74,0.65 2.74,-0.65 3.04,-0.65 3.04,-2.65 2.04,-2.65 2.04,-0.65 2.34,-0.65 2.34,0.65 2.04,0.65 2.04,2.65
2X5-PTH-1.27MM [mm] "2X5-PTH-1.27MM"
  round 1 hole 0.508: 1(-2.54,-0.635) 2(-2.54,0.635) 3(-1.27,-0.635) 4(-1.27,0.635) 5(0,-0.635) 6(0,0.635) 7(1.27,-0.635) 8(1.27,0.635) 9(2.54,-0.635) 10(2.54,0.635)
3V34 [mil] "3V34"
0603 [mm] "0603"
  rect 1.1x1 smd: 1(-0.85,0) 2(0.85,0)
  Top keep-out lines w0.051: -1.6,-0.7 -1.6,0.7 1.6,0.7 1.6,-0.7 -1.6,-0.7
1210 [mm] "1210"
  rect 1x2.8 smd: 1(-1.5,0) 2(1.5,0)
  Top keep-out lines w0.051: -2.215,-1.575 -2.215,1.575 2.215,1.575 2.215,-1.575 -2.215,-1.575
22229 [mil] "22229"
#3V3#1 [mil] "#3V3#1"
#3V3_LED#10 [mil] "#3V3_LED#10"
##CIPO1##DAT0#5178038 [mil] "##CIPO1##DAT0#5178038"
##CS1##5178039 [mil] "##CS1##5178039"
##CS1##DAT3#5178037 [mil] "##CS1##DAT3#5178037"
##CS##0 [mil] "##CS##0"
##CS##5178037 [mil] "##CS##5178037"
##I2C_INT##10 [mil] "##I2C_INT##10"
##RESET##7 [mil] "##RESET##7"
#A0#10 [mil] "#A0#10"
#A1#10 [mil] "#A1#10"
#BYP#8 [mil] "#BYP#8"
#CAN_RX#9 [mil] "#CAN_RX#9"
#CAN_RX#10 [mil] "#CAN_RX#10"
#CAN_TX#10 [mil] "#CAN_TX#10"
#CIPO1#5178039 [mil] "#CIPO1#5178039"
#CIPO#3 [mil] "#CIPO#3"
#CIPO#5178038 [mil] "#CIPO#5178038"
#COPI1#2 [mil] "#COPI1#2"
#COPI#2 [mil] "#COPI#2"
#COPI#4 [mil] "#COPI#4"
#CTS#6 [mil] "#CTS#6"
#CTS#8 [mil] "#CTS#8"
#D0#0 [mil] "#D0#0"
#DAT1#5 [mil] "#DAT1#5"
#DAT1#5178039 [mil] "#DAT1#5178039"
#DAT2#5 [mil] "#DAT2#5"
#DAT2#5178039 [mil] "#DAT2#5178039"
#EN#0 [mil] "#EN#0"
#G0#2 [mil] "#G0#2"
#G1#2 [mil] "#G1#2"
#G2#2 [mil] "#G2#2"
#G3#3 [mil] "#G3#3"
#G4#4 [mil] "#G4#4"
#G5#5 [mil] "#G5#5"
#G6#6 [mil] "#G6#6"
#G7#7 [mil] "#G7#7"
#G8#8 [mil] "#G8#8"
#G9#9 [mil] "#G9#9"
#G9#ADC##CAM_HSYNC#9 [mil] "#G9#ADC##CAM_HSYNC#9"
#G10#10 [mil] "#G10#10"
#G10#ADC##CAM_VSYNC#10 [mil] "#G10#ADC##CAM_VSYNC#10"
#G11#10 [mil] "#G11#10"
#GND#0 [mil] "#GND#0"
#HOST_D##9 [mil] "#HOST_D##9"
#HOST_D##10 [mil] "#HOST_D##10"
#I2S_CLK#5 [mil] "#I2S_CLK#5"
#I2S_CLK#7 [mil] "#I2S_CLK#7"
#I2S_FS#5 [mil] "#I2S_FS#5"
#I2S_FS#7 [mil] "#I2S_FS#7"
#I2S_SDI#5 [mil] "#I2S_SDI#5"
#I2S_SDI#CAM_PCLK#7 [mil] "#I2S_SDI#CAM_PCLK#7"
#I2S_SDO#5 [mil] "#I2S_SDO#5"
#I2S_SDO#CAM_MCLK#7 [mil] "#I2S_SDO#CAM_MCLK#7"
#MCLK#4 [mil] "#MCLK#4"
#MCLK#6 [mil] "#MCLK#6"
#MEAS#10 [mil] "#MEAS#10"
#PWM0#10 [mil] "#PWM0#10"
#PWM1#10 [mil] "#PWM1#10"
#RESET10 [mil] "#RESET10"
#RTS#5 [mil] "#RTS#5"
#RTS#7 [mil] "#RTS#7"
#RX2#3 [mil] "#RX2#3"
#RX#8 [mil] "#RX#8"
#RX#10 [mil] "#RX#10"
#SCK1#2 [mil] "#SCK1#2"
#SCK#2 [mil] "#SCK#2"
#SCK#4 [mil] "#SCK#4"
#SCL1#3 [mil] "#SCL1#3"
#SCL#5 [mil] "#SCL#5"
#SDA1#3 [mil] "#SDA1#3"
#SDA#4 [mil] "#SDA#4"
#SWD#10 [mil] "#SWD#10"
#TX2#2 [mil] "#TX2#2"
#TX#7 [mil] "#TX#7"
#TX#9 [mil] "#TX#9"
#VHOST#0 [mil] "#VHOST#0"
#VIN#6 [mil] "#VIN#6"
#VIN_LED#10 [mil] "#VIN_LED#10"
ATP0 [mil] "ATP0"
ATP_CARRIER_BOARD1 [mil] "ATP_CARRIER_BOARD1"
BOOT10 [mil] "BOOT10"
COMBO-JUMPER_2_NC_TRACE [mil] "COMBO-JUMPER_2_NC_TRACE"
  rect 25x50 smd paste+0: 1(-20,0) 2(20,0)
  round 74 hole 40: 3(-50,0) 4(50,0)
  Top region: -27.5,11 7.25,11 7.25,-11 -27.5,-11 -27.5,11
CREATIVE_COMMONS [mil] "CREATIVE_COMMONS"
D10 [mil] "D10"
DO-214BA [mil] "DO-214BA"
  rect 59.84x87.01 smd: A(-80,0) C(80.24,0)
  Top keep-out lines w3.94: -117.4,82.68 116.85,82.68 116.85,-84.65 -117.4,-84.65 -117.4,82.68
EIA3216 [mil] "EIA3216"
  rect 55.12x62.99 smd: +(55.12,0) -(-55.12,0)
  Top keep-out lines w2: 90,39 90,-39 -90,-39 -90,39 90,39
FIDUCIAL-MICRO [mil] "FIDUCIAL-MICRO"
  rrect100% 25x25 smd paste+0: 1(0,0)
I2C4 [mil] "I2C4"
I2C14 [mil] "I2C14"
JST04_1MM_RA [mm] "JST04_1MM_RA"
  rect 0.6x1.35 smd: 1(-1.5,0) 2(-0.5,0) 3(0.5,0) 4(1.5,0)
  rect 1.2x2 smd: NC1(2.8,-3.675) NC2(-2.8,-3.675)
LED-0603 [mm] "LED-0603"
  rrect30% 1x1 smd: A(-0.877,0) C(0.877,0)
M.2-CONNECTOR-E [mm] "M.2-CONNECTOR-E"
  rect 0.3x1.55 smd paste+0: 1(9.25,-5.275) 2(9,2.275) 3(8.75,-5.275) 4(8.5,2.275) 5(8.25,-5.275) 6(8,2.275) 7(7.75,-5.275) 8(7.5,2.275) 9(7.25,-5.275) 10(7,2.275) 11(6.75,-5.275) 12(6.5,2.275) 13(6.25,-5.275) 14(6,2.275) 15(5.75,-5.275) 16(5.5,2.275) 17(5.25,-5.275) 18(5,2.275) 19(4.75,-5.275) 20(4.5,2.275) 21(4.25,-5.275) 22(4,2.275) 23(3.75,-5.275) 32(1.5,2.275) 33(1.25,-5.275) 34(1,2.275) 35(0.75,-5.275) 36(0.5,2.275) 37(0.25,-5.275) 38(0,2.275) 39(-0.25,-5.275) 40(-0.5,2.275) 41(-0.75,-5.275) 42(-1,2.275) 43(-1.25,-5.275) 44(-1.5,2.275) 45(-1.75,-5.275) 46(-2,2.275) 47(-2.25,-5.275) 48(-2.5,2.275) 49(-2.75,-5.275) 50(-3,2.275) 51(-3.25,-5.275) 52(-3.5,2.275) 53(-3.75,-5.275) 54(-4,2.275) 55(-4.25,-5.275) 56(-4.5,2.275) 57(-4.75,-5.275) 58(-5,2.275) 59(-5.25,-5.275) 60(-5.5,2.275) 61(-5.75,-5.275) 62(-6,2.275) 63(-6.25,-5.275) 64(-6.5,2.275) 65(-6.75,-5.275) 66(-7,2.275) 67(-7.25,-5.275) 68(-7.5,2.275) 69(-7.75,-5.275) 70(-8,2.275) 71(-8.25,-5.275) 72(-8.5,2.275) 73(-8.75,-5.275) 74(-9,2.275) 75(-9.25,-5.275)
  rect 1.2x2.75 smd: A1(10.35,-4.5) A2(-10.35,-4.5)
MICROMOD_LOGO_1 [mil] "MICROMOD_LOGO_1"
MICROMOD_MI_LOGO_1 [mil] "MICROMOD_MI_LOGO_1"
ML414H_IV01E [mm] "ML414H_IV01E"
  rect 1x1 smd paste+0 mask+0: +(2.022,2.032)
  rect 4.2x1.7 smd paste+0 mask+0: -(0.6,-1.85)
  Top region: 0.28,2.68 2.68,2.68 2.68,0.28 0.28,2.68
MOUNT10 [mil] "MOUNT10"
OSHW-LOGO-MINI [mil] "OSHW-LOGO-MINI"
PAD.03X.05 [mil] "PAD.03X.05"
  rrect100% 50x50 smd paste+0: P$1(0,0)
QWIIC_5MM [mil] "QWIIC_5MM"
SFE_LOGO_NAME_FLAME_.1 [mil] "SFE_LOGO_NAME_FLAME_.1"
SFE_LOGO_NAME_FLAME_.2 [mil] "SFE_LOGO_NAME_FLAME_.2"
SMT-JUMPER_2_NC_TRACE_SILK [mil] "SMT-JUMPER_2_NC_TRACE_SILK"
  rect 26x50 smd paste+0: 1(-20.5,0) 2(20.5,0)
  Top region: -27.5,5 7.25,5 7.25,-5 -27.5,-5 -27.5,5
SMT-JUMPER_2_NO_SILK [mil] "SMT-JUMPER_2_NO_SILK"
  rect 25x50 smd paste+0: 1(-16,0) 2(16,0)
SOD-323 [mil] "SOD-323"
  rect 24.8x32.68 smd: A(45.28,0) C(-45.28,0)
  Top keep-out lines w5: -65,-30 -65,30 65,30 65,-30 -65,-30
STAND-OFF [mil] "STAND-OFF"
  Top keep-out circle w5: c0,0 r110
  Top keep-out lines w8: 0,-73 cw(c0,0) 0,73 cw(c0,0) 0,-73
  Bottom keep-out lines w8: 0,-73 cw(c0,0) 0,73 cw(c0,0) 0,-73
STAND-OFF-REFLOW-M2.5 [mm] "STAND-OFF-REFLOW-M2.5"
  round 6 hole 3.8: 1(0,0)
TACTILE_SWITCH_SMD_5.2MM [mil] "TACTILE_SWITCH_SMD_5.2MM"
  rect 60x30 smd: 1(-110,75) 2(110,75) 3(-110,-75) 4(110,-75)
UDFN-8 [mm] "UDFN-8"
  rect 0.3x0.65 smd: 1(-0.975,-1.375) 2(-0.325,-1.375) 3(0.325,-1.375) 4(0.975,-1.375) 5(0.975,1.375) 6(0.325,1.375) 7(-0.325,1.375) 8(-0.975,1.375)
  rect 2.35x1.6 smd paste+0: EP(0,0)
USB-A-S-SILK-FEMALE [mil] "USB-A-S-SILK-FEMALE"
  rect 118.11x35.43 smd: D+(283.94,-39.37) D-(283.94,39.37) GND(283.94,-137.8) VBUS(283.94,137.8)
  round 136.5 hole 91: SHLD1(118.11,-258.5) SHLD2(118.11,258.5)
USB-C-16P-2LAYER-PADS [mm] "USB-C-16P-2LAYER-PADS"
  rect 0.3x1 smd: A5(-1.25,-0.34) A6(-0.25,-0.34) A7(0.25,-0.34) A8(1.25,-0.34) B5(1.75,-0.34) B6(0.75,-0.34) B7(-0.75,-0.34) B8(-1.75,-0.34)
  rect 0.6x1 smd: GND(-3.225,-0.34) GND2(3.225,-0.34) VBUS1(-2.45,-0.34) VBUS2(2.45,-0.34)
  oval 0.654x1.308 / inner oval 0.705x1.41 / far side oval 0.654x1.308 hole 0.4: SHLD1(-4.318,-0.915) SHLD2(4.318,-0.915) SHLD3(-4.318,-5.095) SHLD4(4.318,-5.095)
  Top region: 4.818,-4.795 4.818,-5.395 4.78,-5.586 4.672,-5.749 4.509,-5.857 4.318,-5.895 4.318,-5.895 4.127,-5.857 3.964,-5.749 3.856,-5.586 3.818,-5.395 3.818,-5.395 3.818,-4.795 3.856,-4.604 3.964,-4.441 4.127,-4.333 4.318,-4.295 4.318,-4.295 4.509,-4.333 4.672,-4.441 4.78,-4.604 4.818,-4.795 4.818,-4.795
  Top region: -4.318,-5.895 -4.509,-5.857 -4.672,-5.749 -4.78,-5.586 -4.818,-5.395 -4.818,-5.395 -4.818,-4.795 -4.78,-4.604 -4.672,-4.441 -4.509,-4.333 -4.318,-4.295 -4.318,-4.295 -4.127,-4.333 -3.964,-4.441 -3.856,-4.604 -3.818,-4.795 -3.818,-4.795 -3.818,-5.395 -3.856,-5.586 -3.964,-5.749 -4.127,-5.857 -4.318,-5.895 -4.318,-5.895
  Top region: 4.818,-0.365 4.818,-1.465 4.78,-1.656 4.672,-1.819 4.509,-1.927 4.318,-1.965 4.318,-1.965 4.127,-1.927 3.965,-1.819 3.856,-1.656 3.818,-1.465 3.818,-1.465 3.818,-0.365 3.856,-0.174 3.964,-0.011 4.127,0.097 4.318,0.135 4.318,0.135 4.509,0.097 4.672,-0.011 4.78,-0.174 4.818,-0.365 4.818,-0.365
  Top region: -3.818,-0.365 -3.818,-1.465 -3.856,-1.656 -3.965,-1.819 -4.127,-1.927 -4.318,-1.965 -4.318,-1.965 -4.568,-1.898 -4.751,-1.715 -4.818,-1.465 -4.818,-1.465 -4.818,-0.365 -4.78,-0.174 -4.672,-0.011 -4.509,0.097 -4.318,0.135 -4.318,0.135 -4.127,0.097 -3.964,-0.011 -3.856,-0.174 -3.818,-0.365 -3.818,-0.365
  Bottom region: 4.318,-5.895 4.509,-5.857 4.672,-5.749 4.78,-5.586 4.818,-5.395 4.818,-5.395 4.818,-4.795 4.78,-4.604 4.672,-4.441 4.509,-4.333 4.318,-4.295 4.318,-4.295 4.127,-4.333 3.964,-4.441 3.856,-4.604 3.818,-4.795 3.818,-4.795 3.818,-5.395 3.856,-5.586 3.964,-5.749 4.127,-5.857 4.318,-5.895 4.318,-5.895
  Bottom region: -4.818,-4.795 -4.818,-5.395 -4.78,-5.586 -4.672,-5.749 -4.509,-5.857 -4.318,-5.895 -4.318,-5.895 -4.127,-5.857 -3.964,-5.749 -3.856,-5.586 -3.818,-5.395 -3.818,-5.395 -3.818,-4.795 -3.856,-4.604 -3.964,-4.441 -4.127,-4.333 -4.318,-4.295 -4.318,-4.295 -4.509,-4.333 -4.672,-4.441 -4.78,-4.604 -4.818,-4.795 -4.818,-4.795
  Bottom region: 3.818,-0.365 3.818,-1.465 3.856,-1.656 3.965,-1.819 4.127,-1.927 4.318,-1.965 4.318,-1.965 4.509,-1.927 4.672,-1.819 4.78,-1.656 4.818,-1.465 4.818,-1.465 4.818,-0.365 4.78,-0.174 4.672,-0.011 4.509,0.097 4.318,0.135 4.318,0.135 4.127,0.097 3.964,-0.011 3.856,-0.174 3.818,-0.365 3.818,-0.365
  Bottom region: -4.818,-0.365 -4.818,-1.465 -4.751,-1.715 -4.568,-1.898 -4.318,-1.965 -4.318,-1.965 -4.127,-1.927 -3.965,-1.819 -3.856,-1.656 -3.818,-1.465 -3.818,-1.465 -3.818,-0.365 -3.856,-0.174 -3.964,-0.011 -4.127,0.097 -4.318,0.135 -4.318,0.135 -4.509,0.097 -4.672,-0.011 -4.78,-0.174 -4.818,-0.365 -4.818,-0.365
VIN3 [mil] "VIN3"